# EAGLE board AS5040 (EAGLE 6.3)
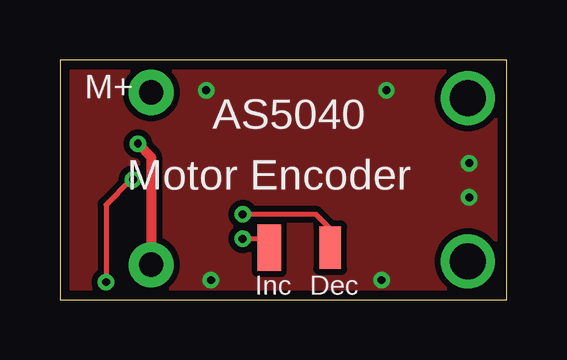
[diagram p0: board, top side]
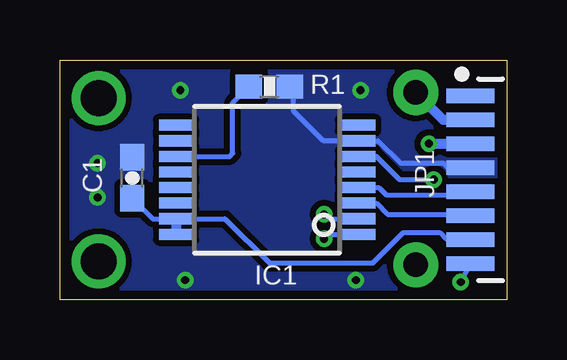
[diagram p1: board, bottom side, seen from below]

Size 18.64 x 10 mm. Coordinates in mm from the lower left corner, seen from the top.
Outline: 0,0 18.64,0 18.64,10 0,10 0,0
Copper layers (1*16): Top 0.0356mm / dielectric 1.5011mm / Bottom 0.0356mm
Design rules "LaenPCBOrder *": minimum track width 6mil, minimum drill 13mil, track to track 6mil, track to pad 6mil, pad to pad 6mil, via to via 6mil, smd to smd 6mil, copper to edge 15mil, drill to drill 6mil, minimum pad ring 7mil, minimum via ring 7mil, stop-mask expansion 4mil, vias tented up to drill 13mil, thermal gap 10mil

## Footprints (pad centres in the part's own frame; a part is rotated, then mirrored left to right if it is on the bottom)
0603-CAP = smd 1.1 x 1: 1 -0.85,0; 2 0.85,0
SSOP16 = smd 0.46 x 1.43: 1 -2.275,-3.795; 2 -1.625,-3.795; 3 -0.975,-3.795; 4 -0.325,-3.795; 5 0.325,-3.795; 6 0.975,-3.795; 7 1.625,-3.795; 8 2.275,-3.795; 9 2.275,3.795; 10 1.625,3.795; 11 0.975,3.795; 12 0.325,3.795; 13 -0.325,3.795; 14 -0.975,3.795; 15 -1.625,3.795; 16 -2.275,3.795
BM08B = smd 0.6 x 2: 1 -3.5,0; 2 -2.5,0; 3 -1.5,0; 4 -0.5,0; 5 0.5,0; 6 1.5,0; 7 2.5,0; 8 3.5,0
1X2SMD = smd 0.914 x 1.778: P$1 -1.27,0 | smd 0.965 x 1.93: P$2 1.27,0
1X01NS = drill 1.016 pad 1.88: 1 0,0
0603-RES = smd 1.1 x 1: 1 -0.85,0; 2 0.85,0

## Placement (x,y rotation side)
C1  [0603-CAP]  15.62,5.08 90 bottom
IC1  AS5040  [SSOP16]  10,5 90 bottom
JP1  [BM08B]  1.52,5 270 bottom
JP2  [1X2SMD]  10,2.16 180 top
JP3  M01SMDNS  [1X01NS]  3.8,1.45 0 top
JP5  M01SMDNS  [1X01NS]  3.8,8.65 0 top
R1  [0603-RES]  9.91,8.89 180 bottom

## Library data of the parts
C1 R1 = SparkFun-Passives
IC1 = austriamicrosystems; MPN: AS5040ASSU; OC_FARNELL: 1630800; OC_NEWARK: 59P4059
JP1-JP3 JP5 = SparkFun-Connectors

## Nets
3.3V: C1.1 IC1.15 IC1.16 JP1.7
CHA: IC1.3 JP1.6
CHB: IC1.4 JP1.5
GND: C1.2 IC1.7 JP1.4 R1.1
INDEX: IC1.6 JP1.8
M1: JP1.3 JP3.1
M2: JP1.2 JP5.1
N$3: IC1.11 R1.2
N$4: IC1.1 JP2.P$2
N$5: IC1.2 JP2.P$1

## Tracks (layer width: path | path; a pad name or v marks a point on that pad's centre or on a via)
3.3V
  Bottom 0.203: C1.1 14.77,3.38 IC1.15 11.76,3.38 9.91,1.52 5.59,1.52 4.32,2.79 2.79,2.79 2.54,2.54 1.56,2.54 JP1.7
  Bottom 0.406: IC1.15 IC1.16
CHA
  Bottom 0.203: IC1.3 5.45,4.03 4.98,3.56 1.58,3.56 JP1.6
CHB
  Bottom 0.203: IC1.4 5.33,4.67 5.03,4.37 1.6,4.37 JP1.5
GND  (via drill 0.33)
  Bottom 0.203: R1.1 8.89,8.72 8.89,7.87 7.64,6.62 IC1.7 5.36,6.62 4.42,5.69 2.64,5.69 2.44,5.49 1.54,5.49 JP1.4 1.61,5.59
  other vias: 6.1,8.74 17.07,5.69 17.07,4.27 13.41,0.81 6.3,0.81 13.61,8.74
  pour Bottom (isolate 0.254, no thermals): 0,0 0,9.96 18.69,9.96 18.69,0
  pour Top (isolate 0.254): 0,0 0,9.96 18.69,9.96 18.69,0
INDEX  (via drill 0.33)
  Top 0.203: v1.92,0.73 1.92,3.95 2.97,5 v3.05,5
  Bottom 0.203: v3.05,5 4.47,5 5.44,5.97 IC1.6 | v1.92,0.73 JP1.8
M1  (via drill 0.33)
  Top 0.406: v3.25,6.5 3.8,5.95 JP3.1
  Bottom 0.406: JP1.3 v3.25,6.5
M2
  Bottom 0.406: JP1.2 2.65,7.5 JP5.1
N$1  (via drill 1.5)
  other vias: 17.02,8.4
N$2  (via drill 1.5)
  other vias: 17.02,1.6
N$3
  Bottom 0.203: IC1.11 11.55,5.97 11.43,6.1 11.43,8.22 R1.2
N$4  (via drill 0.33)
  Top 0.203: JP2.P$2 8.4,2.54 v7.62,2.54
  Bottom 0.203: v7.62,2.54 7.43,2.73 IC1.1
N$5  (via drill 0.33)
  Top 0.203: JP2.P$1 11.32,2.9 10.67,3.56 v7.62,3.56
  Bottom 0.203: v7.62,3.56 7.44,3.38 IC1.2

## Text on the board
tNames: M+ | AS5040 | Motor Encoder | Inc | Dec